# Altium PCB SLT_4U_PEE_V100.PcbDoc (part 7 of 7)
Units mm, origin at the board's own origin, x right, y up, seen from the top; angles counter-clockwise.
Board outline 180 x 80 mm, 6 copper layers (L1 TOP, L2 GND 1, L3 SIGNAL, L4 PWR, L5 GND 2, L6 BOT), stack 1.536 mm thick; 1123 components, 840 nets, 3813 pads, 351 vias.
Unrouted connection lines stored in the file: 2064.
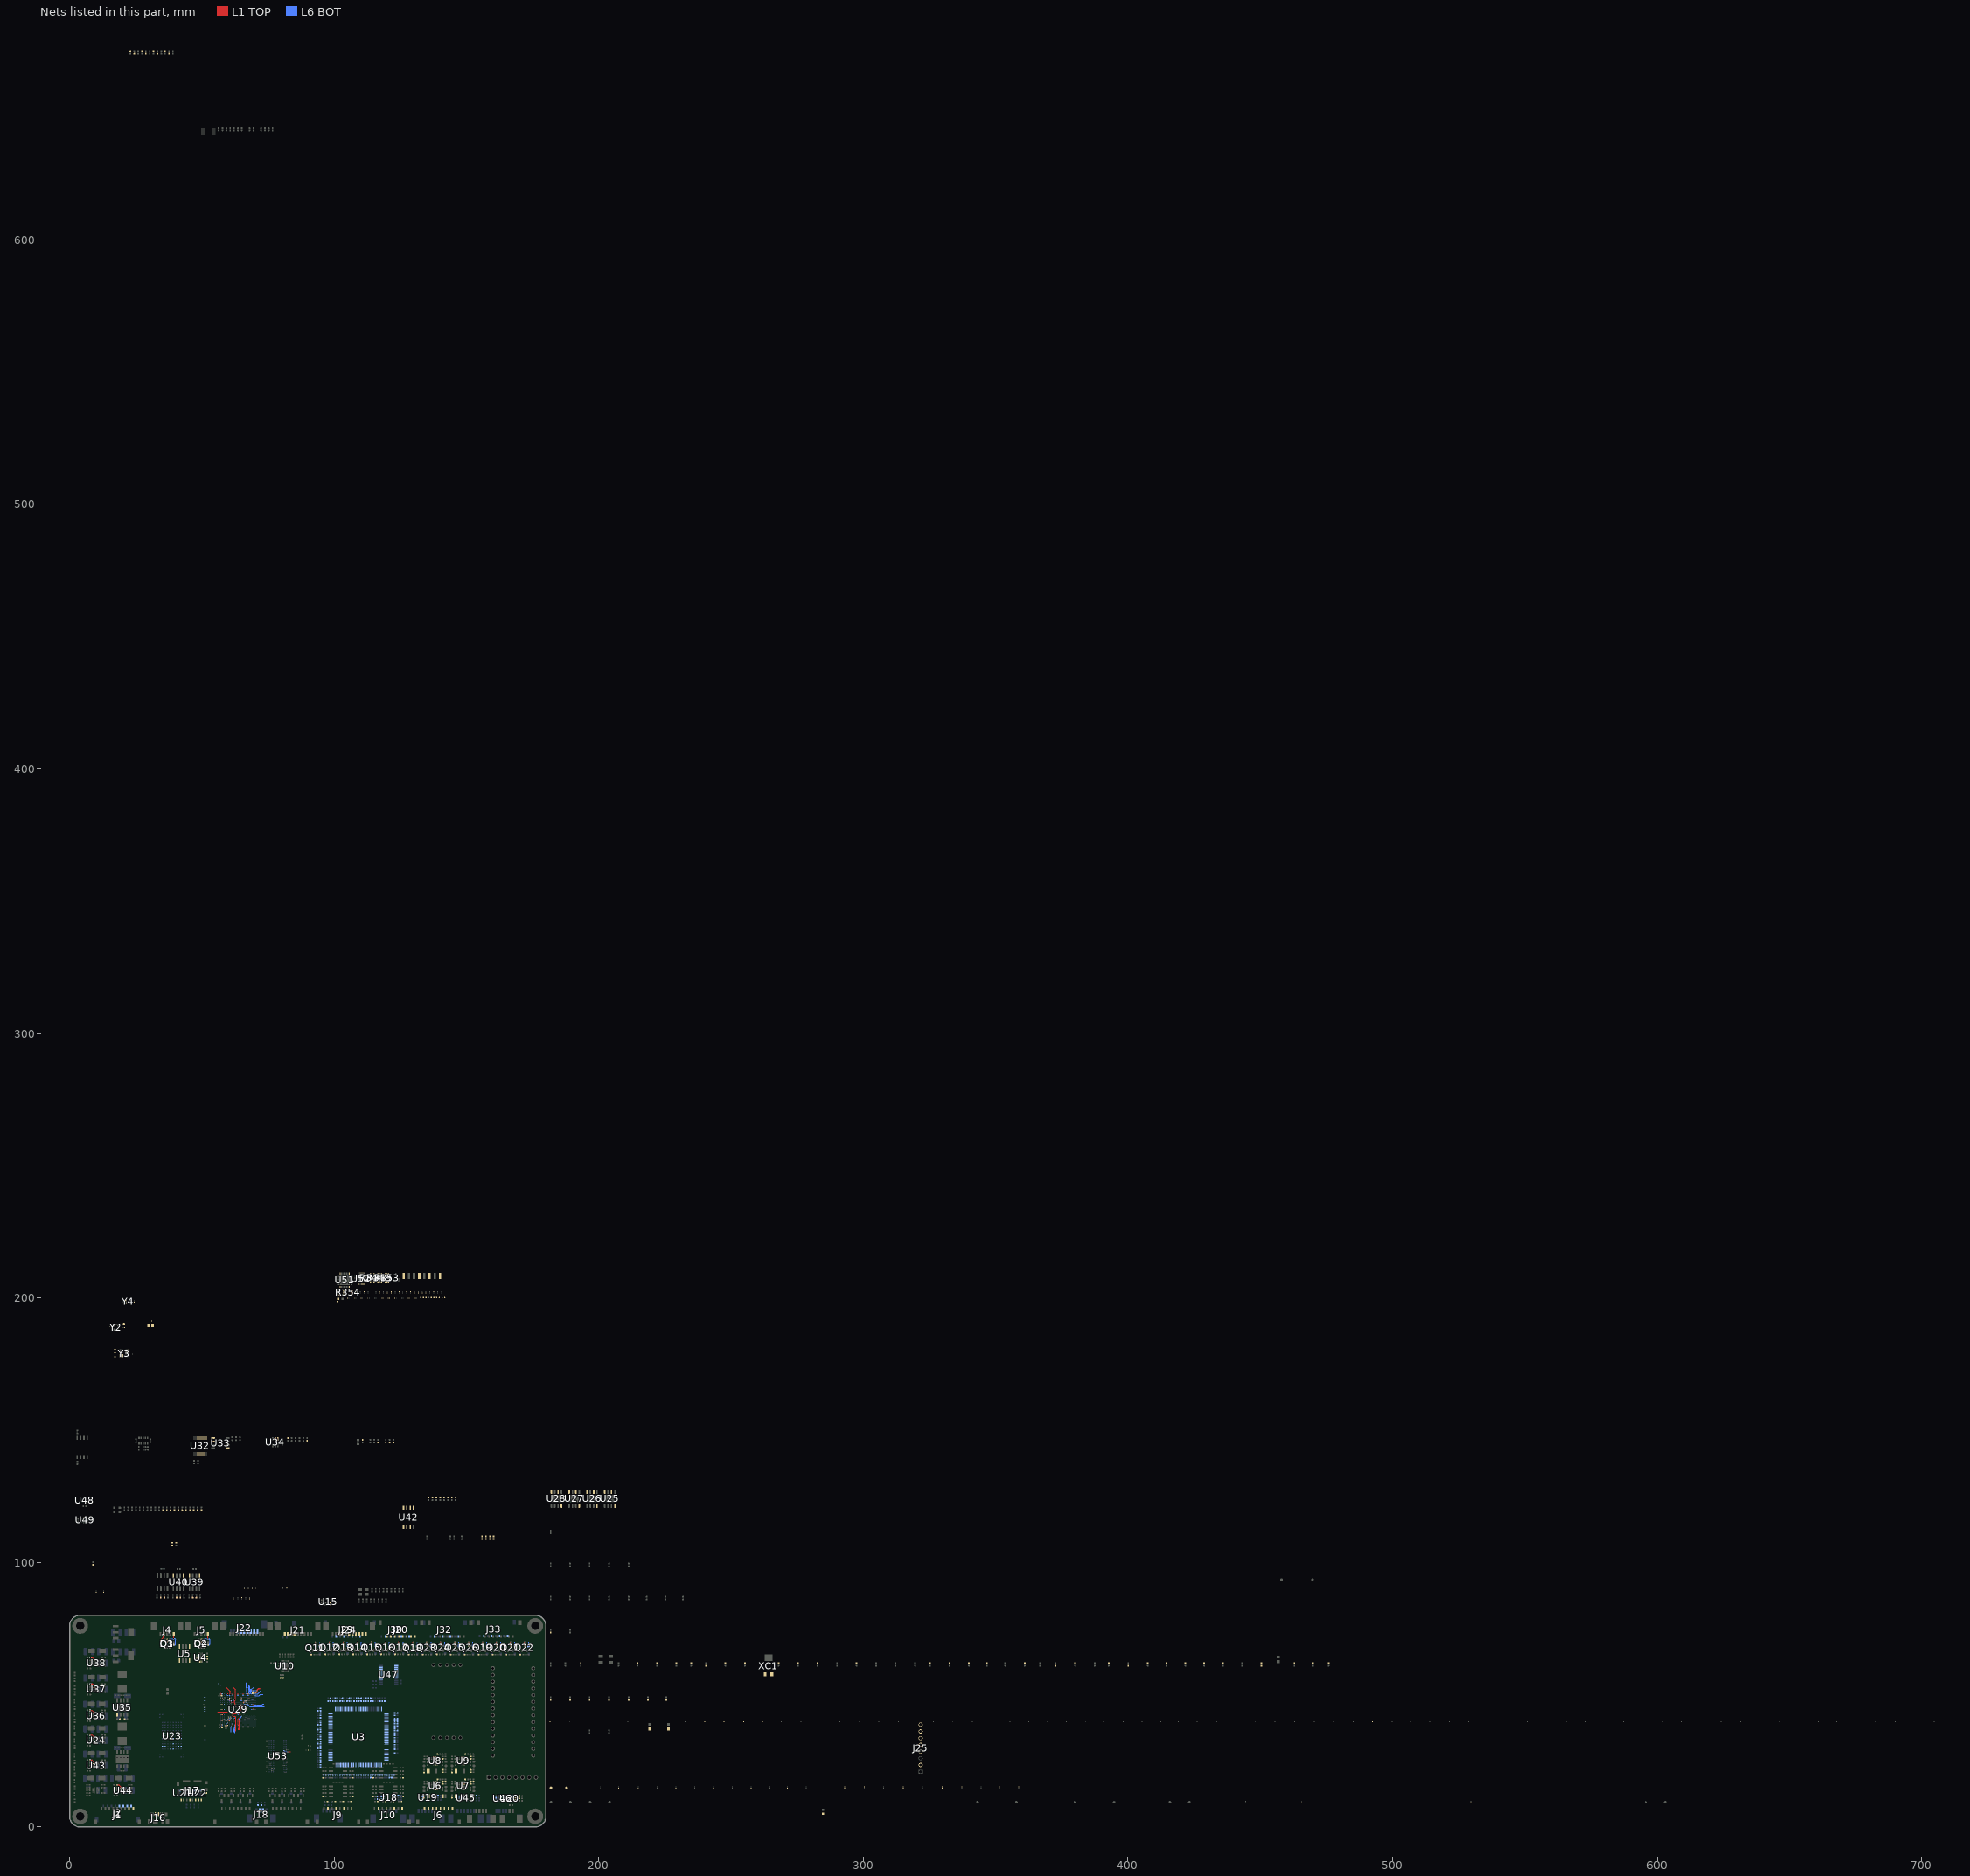
[diagram p7: the nets of this part, all layers, seen from the top]

## Via types
v1: diameter 0.35, hole 0.15, L1 TOP to L6 BOT, 281 vias
v2: diameter 0.4, hole 0.2, L1 TOP to L6 BOT, 61 vias
v3: diameter 0.4, hole 0.2, L1 TOP to L6 BOT, tented both sides, 9 vias

## Nets (pads, with @x,y where several pads share a name; then routed paths per layer and width w, separated by ;. In a path a pad name is that pad's centre, name@x,y a point inside that pad or via, vN(x,y) a via of type N, cw(c..) or ccw(c..) an arc to the next point about the centre after c; other vN are vias at no path point) (continued)
NetR531_2: R531.2 U29.H13 | length 7.6
  L1 TOP w0.125: 61.937,52.812 62.762,51.987 62.762,47.887 62.387,47.512 62.387,47.037 62.512,46.912 62.512,46.574 62.575,46.511 62.575,46.186 v1(62.612,46.148)
  L6 BOT w0.125: U29.H13@62.362,46.412 62.362,46.405 62.612,46.155 v1(62.612,46.148)
NetR532_2: R532.2 U29.C16 | length 3.9
  L1 TOP w0.125: 59.237,52.837 60.737,51.337 v1(60.737,49.987)
  L6 BOT w0.1: U29.C16@60.412,49.662 v1(60.737,49.987)
NetR539_1: R539.1 U53.L8 | length 2.6
  L1 TOP w0.125: v1(82.462,28.462) 83.475,28.462
  L6 BOT w0.125: U53.L8@81.062,28.862 81.462,28.462 v1(82.462,28.462)
NetU51_24: U51.24
NTC1-: J9.2 R170.1 R172.2
NTC2-: J9.4 R176.1 R178.2
NTC3-: J9.6 R182.1 R184.2
NTC4-: J9.8 R188.1 R190.2
NTC5-: J10.2 R171.1 R173.2
NTC6-: J10.4 R177.1 R179.2
NTC7-: J10.6 R183.1 R185.2
NTC8-: J10.8 R189.1 R191.2
NTRST_PC25: C299.2 J25.6 R534.1 U29.B1 | length 2.6
  L6 BOT w0.125: U29.B1@70.162,50.319 71.169,50.319 72.275,51.425
OBC_CANH: J1.8 R440.1 R445.1 R450.1
OBC_CANL: J1.9 R444.1 R449.1 R454.1
OBC_VS_SOM_SPI_SG_CS: J2.1 R356.1
OBC_VS_SOM_SPI_SG_MISO: J2.4 R358.1
OBC_VS_SOM_SPI_SG_MOSI: J2.3 R361.1
OBC_VS_SOM_SPI_SG_SCK: J2.2 R486.1
PA00: R11.1 U3.102
PA01: R13.1 U3.99
PA02: R15.1 U3.93
PA03: R17.1 U3.91
PA04: R18.1@94.886,26.162 U3.77
PA05: R20.1 U3.73
PA06: R22.1 U3.114
PA07_XIN32: C16.2 U3.35 XC1.1
PA08_XOUT32: C17.2 U3.36 XC1.2
PA09: R24.1 U3.75
PA10: R26.1@100.457,19.702 U3.66
PA11: R28.1 U3.64
PA12: R30.1 U3.68
PA13: R32.1 U3.42
PA14: R34.1 U3.51
PA15: R36.1 U3.49
PA16: R37.1 U3.45
PA17: R38.1 U3.25
PA18: J21.9 R272.2 U3.24
PA19: C213.2 R143.1 U3.23
PA20: C215.2 R150.1 U3.22
PA21: C216.2 R151.1 U3.32
PA22: R44.1 U3.37
PA23: R46.1 U3.46
PA24: R47.1 U3.56
PA25: R48.1 U3.59
PA26: R50.1 U3.62
PA27: R52.1 U3.70
PA28: R54.1 U3.112
PA29: R56.1 U3.129
PA30: R58.1 U3.116
PA31: R59.1 U3.118
PB00: C225.2 R73.2 U3.21
PB01: C226.2 R75.2 U3.20
PB02: C227.2 R77.2 U3.26
PB03: C228.2 R79.2 U3.31
PB04: R81.2 U3.105
PB05: R83.2 R86.2 U3.109
PB06: R85.2 U3.79
PB07: R88.2 U3.89
PB08: R90.2 U3.141
PB09: R92.2 U3.142
PB12: R94.2 U3.87
PB13: R96.2 U3.144
PC00: R278.1 U3.11
PC01: C217.2 R64.1 U3.38
PC02: R66.1 U3.39
PC03: R68.1 U3.40
PC04: R69.1 U3.41
PC05: R70.1 U3.58
PC06: R71.1 U3.54
PC07: R72.1 U3.48
PC08: R74.1 U3.82
PC09: R76.1 U3.86
PC10: R78.1 U3.90
PC11: R80.1 U3.94
PC12: R82.1 U3.17
PC13: C218.2 R84.1 U3.19
PC14: R87.1 U3.97
PC15: C219.2 R89.1 U3.18
PC16: R91.1 U3.100
PC17: R93.1 U3.103
PC18: R95.1 U3.111
PC19: R97.1 U3.117
PC20: R98.1 U3.120
PC21: R99.1 U3.122
PC22: R100.1 U3.124
PC23: R101.1 U3.127
PC24: R102.1 U3.130
PC25: R286.1 U3.133
PC26: R103.1 U3.13
PC27: R104.1 U3.12
PC28: R105.1 U3.76
PC29: C220.2 R106.1 U3.16
PC30: C221.2 R107.1 U3.15
PC31: C223.2 R108.1 U3.14
PD00: R12.2 U3.1
PD01: R14.2 U3.132
PD02: R16.2 U3.131
PD03: R18.2@475.831,61.985 U3.128
PD04: R19.2 U3.126
PD05: R21.2 U3.125
PD06: R23.2 U3.121
PD07: R25.2@470.006,61.985 U3.119
PD08: R26.2@450.43,61.985 U3.113
PD09: R25.2@99.568,47.608 U3.110
PD10: R27.2 U3.101
PD11: R29.2 U3.98
PD12: R31.2 U3.92
PD13: R33.2 U3.88
PD14: R35.2 U3.84
PD15: R131.2 U3.106
PD16: R133.2 U3.78
PD17: R39.2 U3.74
PD18: R40.2 U3.69
PD19: R41.1 U3.67
PD20: R42.2 U3.65
PD21: R43.2 U3.63
PD22: R45.2 U3.60
PD23: R126.2 U3.57
PD24: R127.2 U3.55
PD25: R49.2 U3.52
PD26: R51.2 U3.53
PD27: R53.2 U3.47
PD28: R55.2 U3.71
PD29: R57.1 U3.108
PD30: R277.1 U3.34
PD31: R60.2 U3.2
PE00: R279.2 U3.4
PE01: R65.2 U3.6
PE02: R67.2 U3.7
PE03: C229.2 R281.2 U3.10
PE04: C230.2 R282.2 U3.27
PE05: C231.2 R283.2 U3.28
PHOTO_ADC_CONV: J21.8 R36.2 R271.2
PHOTO_ADC_CS: J21.7 R12.1 R270.2
PHOTO_SPI0_nCS2: J21.6 R31.1 R269.2
POW_ONOFF_BUCK_PERI: R133.1 R411.2 R414.1 U35.5
POW_ONOFF_HD4: R21.1 R424.2 R429.1 U37.1 | length 2.5
  L1 TOP w0.254: v2(7.859,54.078) 8.479,54.078 cw(c8.479,53.824) 8.659,54.004 9.315,53.348 cw(c9.135,53.168) 9.389,53.168 9.389,52.937 U37.1@9.19,52.738
POW_ONOFF_HEATER: R131.1 R210.2 R223.1 U44.1 | length 2.5
  L1 TOP w0.254: v2(17.938,15.883) 18.559,15.883 cw(c18.559,15.629) 18.738,15.809 19.394,15.153 cw(c19.214,14.974) 19.468,14.974 19.468,14.742 U44.1@19.269,14.543
POW_ONOFF_LP: R26.1@450.43,60.985 R128.2 R139.1 U43.1 | length 2.5
  L1 TOP w0.254: v2(7.772,25.281) 8.393,25.281 cw(c8.393,25.027) 8.572,25.207 9.228,24.551 cw(c9.048,24.372) 9.302,24.372 9.302,24.14 U43.1@9.103,23.941
POW_ONOFF_Solenoid: R23.1 R432.2 R437.1 U38.1 | length 2.5
  L1 TOP w0.254: v2(7.874,64.008) 8.495,64.008 cw(c8.495,63.754) 8.674,63.934 9.33,63.278 cw(c9.15,63.099) 9.404,63.099 9.404,62.867 U38.1@9.205,62.668
POW_ONOFF_SOM: R16.1 R248.2 R252.1 U24.1 | length 2.5
  L1 TOP w0.254: v2(7.775,34.806) 8.396,34.806 cw(c8.396,34.552) 8.575,34.732 9.231,34.076 cw(c9.051,33.897) 9.305,33.897 9.305,33.665 U24.1@9.106,33.466
POW_ONOFF_TEC: R19.1 R416.2 R421.1 U36.1 | length 2.5
  L1 TOP w0.254: v2(7.775,44.077) 8.396,44.077 cw(c8.396,43.823) 8.575,44.003 9.231,43.347 cw(c9.051,43.168) 9.305,43.168 9.305,42.936 U36.1@9.106,42.737
PRAM_MISO: U32.12 U33.2
PRAM_MOSI: U32.9 U33.5
PRAM_nCS: U32.4 U33.1
PRAM_SCK: U32.7 U33.6
SAM7_FLEX1_I2C_SCL: R329.2 R345.2 R515.1 U52.4
SAM7_FLEX1_I2C_SDA: R330.2 R343.2 R514.1 U52.5
SD2_CLK: J17.P5 R231.1 R485.1 U21.3
SD2_CMD: J17.P3 R232.1 R459.1 U22.6
SD2_DATA0: J17.P7 R227.1 R487.1 U21.6
SD2_DATA1: J17.P8 R228.1 R510.1 U21.1
SD2_DATA2: J17.P1 R229.1 R511.1 U22.3
SD2_DATA3: J17.P2 R230.1 R512.1 U22.4
SD2_nCD: J17.P9 R226.1 R513.1
SENSE1_N: R353.4 U52.12
SENSE1_P: R353.3 U52.11
SENSE2_N: R354.4 U52.14
SENSE2_P: R354.3 U52.13
SENSE3_N: R344.4 U52.7
SENSE3_P: R344.3 U52.8
SENSE4_N: R349.4 U52.9
SENSE4_P: R349.3 U52.10
SENSOR1_EN: R76.2 R213.1 U18.5
SENSOR2_EN: R78.2 R217.1 U19.5
SENSOR3_EN: R54.2 R462.1 U45.5
SENSOR4_EN: R56.2 R465.1 U46.5
SENSOR5_EN: R80.2 R225.1 U20.5
SENSOR_I2C1_SCL: R86.1 R206.2 R221.2 U18.2 U19.2 U20.2 U45.2 U46.2 U48.2 U49.13
SENSOR_I2C1_SDA: R81.1 R205.2 R220.2 U18.3 U19.3 U20.3 U45.3 U46.3 U48.4 U49.14
SHDN: R335.1 U29.R9 | length 5.6
  L1 TOP w0.125: 64.237,36.669 64.237,37.037 64.337,37.137 64.337,38.437 64.262,38.512 v1(64.262,40.237)
  L6 BOT w0.1: v1(64.262,40.237) 64.262,41.012 64.837,41.587 64.837,41.683 64.962,41.808 U29.R9@64.962,41.862
SOL_1_OUT1: J20.2 U25.6
SOL_1_OUT2: J20.1 U25.8
SOL_1_VREF: R257.2 R258.1 R260.2 R261.1 R263.2 R264.1 R266.2 R267.1 U25.4 U26.4 U27.4 U28.4
SOL_2_OUT1: J20.4 U26.6
SOL_2_OUT2: J20.3 U26.8
SOL_3_OUT1: J20.6 U27.6
SOL_3_OUT2: J20.5 U27.8
SOL_4_OUT1: J20.8 U28.6
SOL_4_OUT2: J20.7 U28.8
SOLENOID_A_1: DZ1.1 J29.2 Q11.3 | length 2.8
  L1 TOP w0.254: Q11.3@92.964,68.691 v2(92.964,69.977)
  L6 BOT w0.254: DZ1.1@94.517,68.326 94.517,69.857
SOLENOID_A_2: DZ2.1 J29.4 Q12.3 | length 2.8
  L1 TOP w0.254: Q12.3@98.23,68.818 v2(98.23,70.104)
  L6 BOT w0.254: DZ2.1@99.783,68.453 99.783,69.984
SOLENOID_A_3: DZ3.1 J29.6 Q13.3 | length 2.8
  L1 TOP w0.254: Q13.3@103.497,68.818 v2(103.497,70.104)
  L6 BOT w0.254: DZ3.1@105.05,68.453 105.05,69.984
SOLENOID_A_4: DZ4.1 J29.8 Q14.3 | length 2.8
  L1 TOP w0.254: Q14.3@108.763,68.818 v2(108.763,70.104)
  L6 BOT w0.254: DZ4.1@110.316,68.453 110.316,69.984
SOLENOID_A_5: DZ5.1 J30.2 Q15.3 | length 2.8
  L1 TOP w0.254: Q15.3@114.029,68.802 v2(114.029,70.088)
  L6 BOT w0.254: DZ5.1@115.582,68.437 115.582,69.968
SOLENOID_A_6: DZ6.1 J30.4 Q16.3 | length 2.8
  L1 TOP w0.254: Q16.3@119.295,68.818 v2(119.295,70.104)
  L6 BOT w0.254: DZ6.1@120.848,68.453 120.848,69.984
SOLENOID_A_7: DZ7.1 J30.6 Q17.3 | length 2.8
  L1 TOP w0.254: Q17.3@124.562,68.818 v2(124.562,70.104)
  L6 BOT w0.254: DZ7.1@126.115,68.453 126.115,69.984
SOLENOID_A_8: DZ8.1 J30.8 Q18.3 | length 2.8
  L1 TOP w0.254: Q18.3@129.828,68.691 v2(129.828,69.977)
  L6 BOT w0.254: DZ8.1@131.381,68.326 131.381,69.857
SOLENOID_A_9: DZ9.1 J32.2 Q19.3 | length 2.8
  L1 TOP w0.254: Q19.3@156.159,68.716 v2(156.159,70.002)
  L6 BOT w0.254: DZ9.1@157.712,68.351 157.712,69.883
SOLENOID_A_10: DZ10.1 J32.4 Q20.3 | length 2.8
  L1 TOP w0.254: Q20.3@161.425,68.716 v2(161.425,70.002)
  L6 BOT w0.254: DZ10.1@162.978,68.351 162.978,69.883
SOLENOID_A_11: DZ11.1 J32.6 Q21.3 | length 2.8
  L1 TOP w0.254: Q21.3@166.692,68.716 v2(166.692,70.002)
  L6 BOT w0.254: DZ11.1@168.245,68.351 168.245,69.883
SOLENOID_A_12: DZ12.1 J32.8 Q22.3 | length 2.8
  L1 TOP w0.254: Q22.3@171.958,68.716 v2(171.958,70.002)
  L6 BOT w0.254: DZ12.1@173.511,68.351 173.511,69.883
SOLENOID_A_13: DZ13.1 J33.2 Q23.3 | length 2.8
  L1 TOP w0.254: Q23.3@135.094,68.716 v2(135.094,70.002)
  L6 BOT w0.254: DZ13.1@136.647,68.351 136.647,69.883
SOLENOID_A_14: DZ14.1 J33.4 Q24.3 | length 2.8
  L1 TOP w0.254: Q24.3@140.36,68.818 v2(140.36,70.104)
  L6 BOT w0.254: DZ14.1@141.913,68.453 141.913,69.984
SOLENOID_A_15: DZ15.1 J33.6 Q25.3 | length 2.8
  L1 TOP w0.254: Q25.3@145.627,68.716 v2(145.627,70.002)
  L6 BOT w0.254: DZ15.1@147.18,68.351 147.18,69.883
SOLENOID_A_16: DZ16.1 J33.8 Q26.3 | length 2.8
  L1 TOP w0.254: Q26.3@150.893,68.716 v2(150.893,70.002)
  L6 BOT w0.254: DZ16.1@152.446,68.351 152.446,69.883
SOLENOID_CTR_1: R466.2 U47.4
SOLENOID_CTR_2: R467.2 U47.5
SOLENOID_CTR_3: R468.2 U47.6
SOLENOID_CTR_4: R469.2 U47.7
SOLENOID_CTR_5: R474.2 U47.8
SOLENOID_CTR_6: R475.2 U47.9
SOLENOID_CTR_7: R476.2 U47.10
SOLENOID_CTR_8: R477.2 U47.11
SOLENOID_CTR_9: R201.2 U47.13
SOLENOID_CTR_10: R202.2 U47.14
SOLENOID_CTR_11: R491.2 U47.15
SOLENOID_CTR_12: R492.2 U47.16
SOLENOID_CTR_13: R497.2 U47.17
SOLENOID_CTR_14: R498.2 U47.18
SOLENOID_CTR_15: R499.2 U47.19
SOLENOID_CTR_16: R500.2 U47.20
SOM_CAM_CK_N: J24.5 R312.1
SOM_CAM_CK_P: J24.6 R314.1
SOM_CAM_D0_N: J24.1 R316.1
SOM_CAM_D0_P: J24.2 R318.1
SOM_CAM_D1_N: J24.3 R319.1
SOM_CAM_D1_P: J24.4 R320.1
SOM_CAM_I2C_SCL: J24.9 R520.1
SOM_CAM_I2C_SDA: J24.8 R522.1
SOM_CANRX0: R519.1 U39.4
SOM_CANRX1: R523.1 U40.4
SOM_CANTX0: R517.1 U39.1
SOM_CANTX1: R521.1 U40.1
SOM_CONSOLE_RX: J18.3 R245.1 R518.1
SOM_CONSOLE_TX: J18.2 R244.1 R516.1
SOM_EMMC_nRST: R243.1 R360.1 U23.M5@39.164,31.48
SOM_MRAM_QSPI_CLK: R385.1 U42.6
SOM_MRAM_QSPI_IO0: R383.1 U42.5
SOM_MRAM_QSPI_IO1: R382.1 U42.2
SOM_MRAM_QSPI_IO2: R380.1 U42.3
SOM_MRAM_QSPI_IO3: R378.1 U42.7
SOM_PHOTO_ADC_CONV: J22.8 R275.2
SOM_PHOTO_ADC_EOC: J22.9 R276.2 R524.1
SOM_PHOTO_ADC_nCS: J22.7 R274.2 R370.1
SOM_PHOTO_SPI_MISO: J22.5 R364.1
SOM_PHOTO_SPI_MOSI: J22.4 R362.1
SOM_PHOTO_SPI_SCK: J22.3 R367.1
SOM_PHOTO_SW_nCS: J22.6 R273.2 R359.1
SOM_PRAM_nCS: R287.1 R456.1 U32.3
SOM_PRAM_SPI_MISO: R458.1 U32.13
SOM_PRAM_SPI_MOSI: R457.1 U32.10
SOM_PRAM_SPI_SCK: R395.1 U32.6
SOM_RAM_QSPI_nCS: R384.1 R455.1 U42.1
SOM_SDMMC0_OUT_CK: R242.1 R355.1 U23.P6@38.164,29.48
SOM_SDMMC0_OUT_CMD: R241.1 R357.1 U23.P5@39.164,29.48
SOM_SDMMC0_OUT_D0: R240.1 R363.1 U23.K2@42.164,33.48
SOM_SDMMC0_OUT_D1: R239.1 R365.1 U23.N2@42.164,30.48
SOM_SDMMC0_OUT_D2: R238.1 R368.1 U23.K3@41.164,33.48
SOM_SDMMC0_OUT_D3: R237.1 R371.1 U23.N3@41.164,30.48
SOM_SDMMC0_OUT_D4: R236.1 R373.1 U23.N8@36.164,30.48
SOM_SDMMC0_OUT_D5: R235.1 R375.1 U23.K8@36.164,33.48
SOM_SDMMC0_OUT_D6: R234.1 R377.1 U23.N9@35.164,30.48
SOM_SDMMC0_OUT_D7: R233.1 R379.1 U23.K9@35.164,33.48
SOM_SDMMC0_OUT_DS: R381.1 U23.K5@39.164,33.48
SOM_STATUS_LED_1: DS12.1 R531.1
SOM_STATUS_LED_2: DS13.1 R532.1
SOM_USB_LED_1: R113.1 R530.1
SOM_USB_LED_2: R118.1 R389.1
SOM_USB_N: R308.1 U4.3
SOM_USB_P: R309.1 U4.2
SOM_USB_PWR_EN1: R123.1 R374.1 U5.1
SOM_USB_PWR_EN2: R122.1 R376.1 U5.4
SOM_USB_SW_nOE: R111.2 R366.1 U4.15
SOM_USB_SW_SEL0: R116.1 R369.1 U4.6
SOM_USB_SW_SEL1: R115.1 R372.1 U4.5
TCK_SWCLK_PC26: J25.5 U29.H7 | length 11.4
  L1 TOP w0.1: 64.312,42.512 64.312,43.712 64.487,43.887 64.587,43.887 64.712,44.012 64.712,45.037 64.962,45.287 64.962,45.587 65.137,45.762 65.62,45.762 v1(65.962,46.104)
  L1 TOP w0.125: 63.887,36.703 63.887,37.162 64.037,37.312 64.037,38.237 63.762,38.512 63.762,40.787 64.462,41.487 64.462,42.362 64.312,42.512
  L6 BOT w0.1: v1(65.962,46.104) 65.962,46.112 U29.H7@66.262,46.412
TDI_PC28: J25.4 U29.H6 | length 7.1
  L6 BOT w0.1: U29.H6@66.912,46.412 67.112,46.412 68.087,45.437 73.609,45.437
TDO_PC29: J25.7 U29.A2 | length 2.6
  L6 BOT w0.1: U29.A2@69.512,50.969 69.487,50.994 69.487,51.462 69.64,51.615
  L6 BOT w0.125: 69.64,51.615 69.687,51.662 70.912,51.662 71.348,52.098
TEC_ADC_1: U6.20 U10.2
TEC_ADC_2: U8.20 U10.3
TEC_ADC_3: U7.20 U10.4
TEC_ADC_4: U9.20 U10.5
TEC_nCS_1: R95.2 R124.2 U6.15
TEC_nCS_2: R98.2 R134.2 U8.15
TEC_nCS_3: R100.2 R125.2 U7.15
TEC_nCS_4: R29.1 R135.2 U9.15
TEC_OUT_A_1: C43.2 C44.2 C55.2 J6.5 U6.8 U6.9
TEC_OUT_A_2: C65.2 C66.2 C77.2 J6.1 U8.8 U8.9
TEC_OUT_A_3: C45.2 C46.2 C56.2 J6.7 U7.8 U7.9
TEC_OUT_A_4: C67.2 C68.2 C78.2 J6.3 U9.8 U9.9
TEC_OUT_B_1: C55.1 C61.2 J6.6 L2.2 U6.12
TEC_OUT_B_2: C77.1 C83.2 J6.2 L4.2 U8.12
TEC_OUT_B_3: C56.1 C62.2 J6.8 L3.2 U7.12
TEC_OUT_B_4: C78.1 C84.2 J6.4 L5.2 U9.12
TEC_SPI_MISO: R103.2 R285.2 U6.18 U7.18 U8.18 U9.18 U32.14
TEC_SPI_MOSI: R104.2 U6.17 U7.17 U8.17 U9.17 U32.11
TEC_SPI_SCK: R102.2 U6.16 U7.16 U8.16 U9.16 U32.5
TEC_SWEN_1: R58.2 R130.1 U6.13
TEC_SWEN_2: R33.1 R140.1 U8.13
TEC_SWEN_3: R64.2 R132.1 U7.13
TEC_SWEN_4: R66.2 R142.1 U9.13
"TEMP _SENSOR": R107.2 U15.2
TMS_SWDIO_PC27: J25.8 U29.C1 | length 3.1
  L6 BOT w0.125: U29.C1@70.162,49.665 71.59,49.665 72.035,50.11 73.076,50.11
USB1_N: J16.2 R304.1
USB1_P: J16.3 R305.1
USB_CONN_LED_1: J4.4 R114.2 | length 3.5
  L1 TOP w0.254: R114.2@34.544,69.867 34.544,70.634 cw(c34.798,70.634) 34.618,70.813 35.441,71.636 ccw(c35.261,71.816) 35.515,71.816 35.515,72.793 J4.4@35.62,72.898
USB_PWR1: D3.5 J4.1 Q1.2 R112.1 R121.1 U5.8 | length 8.3
  L1 TOP w0.254: v2(36.901,70.541) D3.5@36.921,70.541 ; v2(39.37,71.12) J4.1@39.37,72.898
  L6 BOT w0.254: v2(36.901,70.541) 37.698,70.541 37.847,70.392 Q1.2@37.847,70.286 ; Q1.2@37.871,70.286 38.044,70.81 38.28,71.046 cw(c38.459,70.866) 38.459,71.12 39.646,71.12 cw(c39.646,70.866) 39.825,71.046 40.037,70.834 cw(c39.857,70.655) 40.111,70.655 40.111,69.172 cw(c39.857,69.172) 40.037,68.993 39.973,68.929 cw(c39.794,69.109) 39.794,68.855 39.52,68.855 R112.1@39.37,68.817
USB_PWR2: D4.5 J5.1 Q2.2 R117.1 R120.1 U5.5 | length 8.3
  L1 TOP w0.254: v2(49.855,70.541) D4.5@49.875,70.541 ; v2(52.324,71.12) J5.1@52.324,72.898
  L6 BOT w0.254: v2(49.855,70.541) 50.652,70.541 50.801,70.392 Q2.2@50.801,70.286 ; Q2.2@50.825,70.286 50.998,70.81 51.234,71.046 cw(c51.413,70.866) 51.413,71.12 v2(52.324,71.12) 52.6,71.12 cw(c52.6,70.866) 52.779,71.046 52.967,70.858 cw(c52.787,70.679) 53.041,70.679 53.041,69.148 cw(c52.787,69.148) 52.967,68.969 52.926,68.928 cw(c52.746,69.108) 52.746,68.854 52.474,68.854 R117.1@52.324,68.817
USBA_N: R299.2 U29.B3 | length 2
  L6 BOT w0.125: 68.537,52.175 68.537,50.644 U29.B3@68.862,50.319
USBA_P: R300.2 U29.A3 | length 2.1
  L6 BOT w0.125: U29.A3@68.862,50.969 68.862,52.04 69.572,52.75
USBB_N: R304.2 U29.B4 | length 3.3
  L6 BOT w0.125: 67.817,53.417 67.817,51.835 67.96,51.692 67.96,51.298 67.9,51.237 67.9,50.625 U29.B4@68.212,50.312
USBB_P: R305.2 U29.A4 | length 2.4
  L6 BOT w0.125: 68.142,53.282 68.142,51.97 68.285,51.827 68.285,51.163 68.246,51.123 68.246,50.996 U29.A4@68.212,50.962
USBC_N: R308.2 U29.B6 | length 4.3
  L6 BOT w0.125: U29.B6@66.912,50.312 66.946,50.346 66.946,50.554 67.225,50.833 67.225,51.092 67.225,52.656 67.125,52.756 67.125,54.279 67.198,54.352 67.212,54.352
USBC_P: R309.2 U29.A6 | length 3.6
  L6 BOT w0.125: U29.A6@66.912,50.962 66.925,50.975 66.925,52.532 66.825,52.632 66.825,54.404 66.912,54.491 66.912,54.512
VDD_1V15_OUT3: C290.2 L9.2 R344.1 TP9.0 U51.25
VDD_1V15_OUT4: C292.2 L10.2 R349.1 TP11.0 U51.32
VDD_1V35: C288.2 L8.2 R354.1 TP7.0 U51.16
VDD_3V3: C191.2 C267.2 C279.2 C282.2 C283.1 C284.1 C285.1 C286.1 J25.2 L7.2 R302.2 R329.1 R330.1 R336.1 R337.1 R340.2 R342.2 R350.1 R353.1 R390.2 R393.2 R455.2 R460.2 R534.2 R535.2 TP6.0 U42.8 U51.9 U52.2 U52.15 Y2.4 Y4.1 Y4.4
VDD_3V3_MPU: C235.1 C236.1 C237.1 C238.1 C239.1 C240.1 C241.1 C242.1 C243.1 C297.1 C298.1 R351.1 R352.1 R353.2 TP14.0 U29.C11 U29.C14 U29.C17 U29.F13 U29.H19 U29.J16 U29.N16 U29.T13 U29.W14 | length 11
  L1 TOP w0.1: C239.1@59.65,43.187 C239.1@59.65,43.225
  L1 TOP w0.2: v1(55.837,43.137) 56.237,43.537 59.337,43.537 C239.1@59.65,43.225
  L1 TOP w0.3: C242.1@57.7,46.412 v1(58.087,46.412) ; C240.1@59.629,45.752 59.639,45.752 59.65,45.762 v1(60.037,45.762) ; C239.1@59.65,43.187 59.675,43.162 v1(60.037,43.162) ; v1(59.762,50.037) C235.1@59.762,50.425 ; C243.1@61.712,38.5 v1(61.712,38.887) ; v1(61.712,50.037) C236.1@61.712,50.425 ; C238.1@62.362,40.45 v1(62.362,40.837) ; v1(62.362,48.087) C237.1@62.362,48.475 ; v1(63.662,50.037) C241.1@63.662,50.425
  L6 BOT w0.3: v1(58.087,46.412) U29.H19@58.462,46.412 ; U29.C17@59.762,49.662 v1(59.762,50.037) ; v1(60.037,43.162) U29.N16@60.412,43.162 ; v1(60.037,45.762) U29.J16@60.412,45.762 ; v1(61.712,38.887) U29.W14@61.712,39.262 ; U29.C14@61.712,49.662 v1(61.712,50.037) ; v1(62.362,40.837) U29.T13@62.362,41.212 ; U29.F13@62.362,47.712 v1(62.362,48.087) ; U29.C11@63.662,49.662 v1(63.662,50.037)
VDDANA: C247.2 C269.1 C270.1 C271.1 C277.1 C278.1 U29.E5 U29.E6 U29.G6 U29.J6 U29.T15 U29.T16 | length 5
  L1 TOP w0.3: v1(60.087,40.887) C270.1@60.087,41.275 ; v1(60.737,40.887) C247.2@60.737,41.275 ; C269.1@67.175,46.337 v1(67.237,46.737) ; C277.1@67.237,48.3 v1(67.237,48.687) ; v1@67.295,45.761 C271.1@67.627,45.761 ; C278.1@67.887,48.3 v1(67.887,48.687)
  L6 BOT w0.3: v1(60.087,40.887) U29.T16@60.412,41.212 ; v1(60.737,40.887) U29.T15@61.062,41.212 ; U29.J6@66.912,45.762 v1(67.287,45.762) ; U29.G6@66.912,47.062 v1(67.237,46.737) ; U29.E6@66.912,48.362 v1(67.237,48.687) ; U29.E5@67.562,48.362 v1(67.887,48.687)
VDDBU: C275.1 R306.2 R339.2 R?.2 U29.P11 | length 9.4
  L1 TOP w0.1: 62.727,41.723 62.587,41.862 61.837,41.862 61.712,41.987 61.712,42.387 62.156,42.831 v1(63.339,42.831)
  L1 TOP w0.125: 62.727,41.723 62.837,41.612 62.837,36.162
  L6 BOT w0.3: v1(63.339,42.831) 63.343,42.831 U29.P11@63.662,42.512
VDDCORE: C244.1 C245.1 C246.1 C248.1 C249.1 C250.1 C251.1 C252.1 C253.1 C254.1 C255.1 C256.1 C257.1 C258.1 C259.1 C260.1 R344.2 TP8.0 U29.F6 U29.F9 U29.F15 U29.J9 U29.J13 U29.L3 U29.L19 U29.N13 U29.P19 U29.U16 U29.U17 U29.U19 U29.W17 U29.Y20 | length 13.2
  L1 TOP w0.3: C254.1@57.412,38.65 57.425,38.65 57.427,38.652 v1(57.484,38.287) C260.1@57.609,37.737 ; C255.1@57.69,40.288 57.695,40.283 57.7,40.287 v1(58.087,40.562) ; C251.1@57.7,42.512 v1(58.088,42.512) ; C257.1@57.7,44.462 v1(58.087,44.462) ; C256.1@59.01,40.3 59.036,40.3 59.061,40.3 59.087,40.3 C256.1@59.09,40.3 ; C256.1@59.09,40.313 v1(59.437,40.237) ; C244.1@59.129,38.272 59.762,38.5 v1(59.762,38.887) ; v1(60.087,40.237) C248.1@60.475,40.237 ; C252.1@60.987,47.325 v1(61.387,47.387) ; C258.1@61.67,42.83 v1(62.037,43.487) ; C259.1@61.975,45.687 v1(62.037,46.087) ; C250.1@64.887,46.1 v1(65.287,46.087) ; v1(64.962,48.187) C249.1@64.962,48.55 ; v1(66.587,47.387) C246.1@66.587,47.775 ; v1(69.237,44.462) 69.26,44.462 C245.1@69.632,44.462
  L6 BOT w0.3: v1(57.484,38.287) 57.487,38.287 U29.Y20@57.812,38.612 ; v1(58.087,40.562) U29.U19@58.462,40.562 ; v1(58.087,44.462) U29.L19@58.462,44.462 ; v1(58.088,42.512) U29.P19@58.462,42.512 ; v1(59.437,40.237) U29.U17@59.762,40.562 ; v1(59.762,38.887) U29.W17@59.762,39.262 ; v1(60.087,40.237) U29.U16@60.412,40.562 ; U29.F15@61.062,47.712 v1(61.387,47.387) ; v1(62.037,43.487) U29.N13@62.362,43.162 ; v1(62.037,46.087) U29.J13@62.362,45.762 ; U29.J9@64.962,45.762 v1(65.287,46.087) ; U29.F9@64.962,47.712 v1(64.962,48.187) ; v1(66.587,47.387) U29.F6@66.912,47.712 ; U29.L3@68.862,44.462 v1(69.237,44.462)
VDDCPU: C150.1 C151.1 C152.1 C232.1 C233.1 C234.1 R349.2 TP10.0 U29.B20 U29.E16 U29.E17 U29.E19 U29.F16 | length 5.1
  L1 TOP w0.3: C233.1@57.426,50.208 57.424,50.208 57.415,49.615 C150.1@57.464,49.615 ; C233.1@57.425,50.237 v1(57.487,50.637) ; C234.1@57.706,48.636 57.716,48.646 57.716,48.649 v1(58.087,48.362) ; C232.1@58.984,48.868 59.243,48.868 59.414,48.697 59.433,48.697 v1@59.447,48.71 ; v1(60.087,48.687) C151.1@60.475,48.687 ; C152.1@60.334,48.047 60.345,48.037 60.35,48.037 v1(60.737,48.037)
  L6 BOT w0.3: v1(57.487,50.637) U29.B20@57.812,50.312 ; v1(58.087,48.362) U29.E19@58.462,48.362 ; v1(59.437,48.687) U29.E17@59.762,48.362 ; v1(60.087,48.687) U29.E16@60.412,48.362 ; U29.F16@60.412,47.712 v1(60.737,48.037)
VDDIN33: C273.1 C274.1 R351.2 U29.H3 | length 1.5
  L1 TOP w0.3: 69.625,46.512 v1(69.237,46.412) 69.637,45.762
  L6 BOT w0.3: U29.H3@68.862,46.412 v1(69.237,46.412)
VDDIODDR: C329.1 C333.1 R354.2 R540.1 R542.1 TP16.0
VDDSDMMC0: TP3.0
VDDSDMMC1: TP4.0
VDDUTMII: C261.1 C262.1 C263.1 C264.1 C266.1 C268.1 R352.2 U29.B2 U29.C5 U29.C8 U29.E3 U29.F7 | length 7.7
  L1 TOP w0.3: v1(65.612,50.037) C266.1@65.612,50.425 ; C262.1@65.675,46.987 v1(65.937,47.387) ; v1(67.539,50.056) 67.549,50.066 67.549,50.411 C263.1@67.562,50.425 ; C261.1@69.184,50.546 69.275,50.637 v1(69.837,50.637) 70.237,50.7 v2@70.718,50.775 ; v1(69.237,48.362) C264.1@69.625,48.362
  L1 TOP w0.5: v2(70.712,50.812) 71.012,51.112 v2(71.012,51.212) 71.012,51.937 71.407,52.332 72.017,52.332
  L6 BOT w0.3: U29.C8@65.612,49.662 v1(65.612,50.037) ; v1(65.937,47.387) U29.F7@66.262,47.712 ; v1(67.539,50.056) 67.549,50.047 67.549,49.675 U29.C5@67.562,49.662 ; U29.E3@68.862,48.362 v1(69.237,48.362) ; U29.B2@69.512,50.312 v1(69.837,50.637)
VLDO1: C295.1 TP12.0 U51.19
VLDO2: C296.1 TP13.0 U51.21
VUSB: J16.1 JP2.2
WD_DONE: R65.1 U34.4
WD_nRESET: R62.2 R402.2 R408.1
WD_WAKE: R67.1 U34.5
WKUP: R339.1 U29.AA15 U51.7 | length 2
  L6 BOT w0.125: 61.062,35.962 U29.AA15@61.062,37.962
XIN: R322.2 R325.2 TP5.0 U29.J2 | length 4.2
  L6 BOT w0.125: U29.J2@69.512,45.762 69.837,46.087 70.01,46.087 70.022,46.075 70.337,46.075 70.362,46.05 70.849,46.05 70.887,46.087 72.762,46.087 73.132,46.457 73.381,46.457
XIN32: C265.1 R324.1 R326.2 U29.Y13 Y1.2 | length 3.2
  L6 BOT w0.125: U29.Y13@62.362,38.612 62.687,38.287 62.687,37.212 62.487,37.012 62.487,35.637
XIN_24M: C276.1 R325.1 R327.2 Y3.3
XOUT: R323.2 R328.2 U29.J1 | length 3.5
  L6 BOT w0.125: U29.J1@70.162,45.762 73.612,45.762
XOUT32: C272.1 R324.2 U29.AA13 Y1.1 | length 2.2
  L6 BOT w0.125: 62.187,35.837 62.187,37.137 62.362,37.312 U29.AA13@62.362,37.962
XOUT_24M: C280.1 R327.1 R328.1 Y3.1
pads on no net: C222.1 C222.2 C224.1 C224.2 J3.1 J3.7 J13.6 J14.6 J16.4 J17.14 J17.15 J25.1 J27.6 J28.6 R41.2 R280.1 R280.2 R284.1 R284.2 TP15.0 U2.2 U2.3 U2.5 U3.136 U3.137 U4.7 U4.8 U4.9 U4.10 U4.16 U5.2 U5.3 U10.10 U10.12 U10.13 U16.23 U16.24 U16.25 U16.26 U21.4 U22.1 U23.A1 U23.A2 U23.A9 U23.A10 U23.B1 U23.B10 U23.D2 U23.D3 U23.D4 U23.D5 U23.D6 U23.D7 U23.D8 U23.D9 U23.E2 U23.E3 U23.E4@40.164,38.48 U23.E5 U23.E6 U23.E7 U23.E8 U23.E9 U23.F2@42.164,37.48 U23.F3@41.164,37.48 U23.F4@40.164,37.48 U23.F5@39.164,37.48 U23.F6@38.164,37.48 U23.F7@37.164,37.48 U23.F8@36.164,37.48 U23.F9@35.164,37.48 U23.G2@42.164,36.48 U23.G3@41.164,36.48 U23.G4@40.164,36.48 U23.G5@39.164,36.48 U23.G6@38.164,36.48 U23.G7@37.164,36.48 U23.G8@36.164,36.48 U23.G9@35.164,36.48 U23.H2@42.164,35.48 U23.H3@41.164,35.48 U23.H4 U23.H5 U23.H6 U23.H7 U23.H8@36.164,35.48 U23.H9@35.164,35.48 U23.J2 U23.J3 U23.J4 U23.J5@39.164,34.48 U23.J6 U23.J7 U23.J8 U23.J9 U23.K2@42.164,33.48 U23.K3@41.164,33.48 U23.K4 U23.K5@39.164,33.48 U23.K6 U23.K7 U23.K8@36.164,33.48 U23.K9@35.164,33.48 U23.L2@42.164,32.48 U23.L3@41.164,32.48 U23.L4@40.164,32.48 U23.L5 U23.L6 U23.L7@37.164,32.48 U23.L8@36.164,32.48 U23.L9@35.164,32.48 U23.M2 U23.M3 U23.M4@40.164,31.48 U23.M5@39.164,31.48 U23.M6 U23.M7@37.164,31.48 U23.M8 U23.M9 U23.N2@42.164,30.48 U23.N3@41.164,30.48 U23.N4 U23.N5 U23.N6 U23.N7 U23.N8@36.164,30.48 U23.N9@35.164,30.48 U23.P2@42.164,29.48 U23.P3@41.164,29.48 U23.P4 U23.P5@39.164,29.48 U23.P6@38.164,29.48 U23.P7 U23.P8@36.164,29.48 U23.P9@35.164,29.48 U23.T1 U23.T10 U23.U1 U23.U2 U23.U9 U23.U10 U29.A15 U29.A16 U29.A20 U29.AA18 U29.AA19 U29.B13 U29.B15 U29.B18 U29.C2 U29.C3 U29.C4 U29.C7 U29.C18 U29.C20 U29.D2 U29.D3 U29.D4 U29.D7 U29.D16 U29.D17 U29.D21 U29.E4 U29.E8 U29.E14 U29.E18 U29.F3 U29.F4 U29.F14 U29.F18 U29.F19 U29.F21 U29.G3 U29.G4 U29.G8 U29.G9 U29.G12 U29.G14 U29.G16 U29.G19 U29.H12 U29.H15 U29.J11 U29.J14 U29.J20 U29.J21 U29.K7 U29.K8 U29.M12 U29.M13 U29.M14 U29.P9 U29.P10 U29.R13 U29.U14 U29.V15 U29.V19 U29.V20 U29.V21 U29.W11 U29.Y15 U29.Y19 U31.8 U31.10 U35.2 U35.3 U45.1 U49.2 U49.3 U49.9 U49.10 U49.11 U50.7 U50.9 U51.17 U53.J1 U53.J9 U53.L1 U53.L9
copper on no net: | length 348
  L1 TOP w0.1: 53.524,46.087 59.462,46.087 v1(60.087,46.712) ; 54.237,47.3 58.05,47.3 v1(58.137,47.387) ; 54.512,44.812 54.787,45.087 61.362,45.087 61.662,44.787 v1(62.037,44.787) ; 55.062,47.812 55.137,47.737 57.31,47.737 57.385,47.812 57.787,47.812 57.962,47.987 58.612,47.987 58.887,47.712 59.762,47.712 v1(60.087,47.387) ; v1(62.037,46.737) 62.037,50.187 ; v1(62.687,43.487) 63.012,43.812 63.012,45.587 63.187,45.762 63.487,45.762 63.737,46.012 63.737,46.937 63.987,47.187 63.987,51.562 63.912,51.637 ; v1(63.337,45.437) 63.662,45.112 64.137,45.112 64.312,45.287 64.312,46.737 64.387,46.812 64.387,47.745 64.587,47.945 ; v1(65.287,47.387) 65.637,47.737 65.762,47.737 65.787,47.712 66.137,47.712 66.262,47.837 66.262,50.287 ; 65.487,51.937 65.287,51.737 65.287,49.887 65.562,49.612 65.562,49.062 v1(65.937,48.687)
  L1 TOP w0.125: 53.472,43.412 54.562,43.412 55.237,44.087 61.987,44.087 v1(62.037,44.137) ; 53.518,44.288 53.988,44.288 54.512,44.812 ; 53.518,47.637 53.9,47.637 54.237,47.3 ; 53.518,48.662 54.212,48.662 55.062,47.812 ; 53.518,49.187 54.393,49.187 55.593,47.987 57.087,47.987 57.237,48.137 v1(57.637,48.137) ; 57.637,52.487 59.212,50.912 59.212,49.562 v1(59.437,49.337) ; 58.171,52.653 58.844,51.98 59.669,51.98 60.387,51.262 60.387,49.637 v1(60.087,49.337) ; 59.598,34.96 59.598,36.298 60.737,37.437 v1(60.737,38.937) ; 59.969,34.96 59.969,36.144 61.187,37.362 61.187,38.862 61.787,39.462 61.787,40.487 v1(61.387,40.887) ; 60.325,52.799 61.362,51.762 61.362,49.887 61.762,49.487 61.762,48.412 v1(61.387,48.037) ; 60.837,52.787 62.112,51.512 62.112,50.462 62.037,50.387 62.037,50.187 ; 61.413,52.737 62.362,51.787 v1(62.362,49.862) ; 63.737,52.832 63.737,51.812 63.912,51.637 ; 64.587,47.945 64.587,52.711 ; 65.487,51.937 65.487,52.711 ; 66.262,50.287 66.637,50.662 66.637,51.687 66.337,51.987 66.337,52.711 ; v1(68.537,47.387) 68.887,47.737 71.162,47.737 71.712,48.287 ; v1(68.537,48.037) 68.562,48.012 70.687,48.012 71.437,48.762 71.756,48.762 ; v1(68.537,48.687) 69.112,49.262 71.778,49.262 ; v1(68.537,49.337) 68.812,49.612 71.287,49.612 71.537,49.862 71.746,49.862 ; v1(68.537,49.987) 70.887,49.987 71.624,50.724 v2(71.624,51.374) ; v1(69.187,47.387) 71.512,47.387 71.987,47.862
  L1 TOP w0.3: 70.775,38.962 v1(71.237,38.562)
  L1 TOP w0.35: 71.237,37.912 v1(71.237,38.562)
  L2 GND 1 w0.102: 90,0.762 90,79.248
  L6 BOT w0.1: 53.762,40.237 58.137,40.237 58.462,39.912 ; 54.912,44.137 55.212,44.437 56.262,44.437 56.562,44.137 58.831,44.137 58.906,44.212 60.212,44.212 60.287,44.137 61.387,44.137 61.712,43.812 ; 54.995,46.762 58.162,46.762 58.462,47.062 ; 56.662,46.087 56.887,46.087 ; v1(57.637,48.137) 57.837,48.137 57.937,48.037 58.787,48.037 59.112,47.712 ; v1(58.137,47.387) 58.462,47.712 ; 59.112,49.662 59.412,49.962 59.412,52.012 ; v1(59.437,49.337) 59.762,49.012 ; v1(60.087,46.712) 60.762,46.712 61.062,46.412 ; v1(60.087,47.387) 60.412,47.062 ; v1(60.087,49.337) 60.412,49.012 ; 61.062,38.612 61.387,38.287 61.387,37.187 ; v1(61.387,40.887) 61.712,40.562 ; v1(61.387,48.037) 61.712,47.712 ; 61.712,45.762 62.037,45.437 v1(62.037,44.787) ; 61.712,47.062 v1(62.037,46.737) ; 61.712,48.362 62.012,48.662 62.512,48.662 62.687,48.837 62.687,49.537 v1(62.362,49.862) ; v1(62.037,44.137) 62.362,43.812 ; 62.362,41.862 62.362,41.637 62.712,41.287 62.712,38.712 62.912,38.512 62.912,36.962 ; 62.362,50.312 62.687,50.637 62.687,52.462 ; 63.012,46.412 62.687,46.737 62.687,47.862 63.087,48.262 63.087,51.987 63.287,52.187 ; 63.012,47.062 63.012,47.812 63.312,48.112 63.312,51.712 63.537,51.937 63.537,51.962 ; v1(63.337,45.437) 63.662,45.762 ; 63.812,37.162 63.987,37.337 63.987,38.187 63.537,38.637 63.537,38.937 63.337,39.137 63.337,41.037 63.987,41.687 63.987,41.987 64.312,42.312 64.312,42.512 ; 64.512,36.727 64.587,36.802 64.587,38.512 64.212,38.887 64.212,39.712 63.887,40.037 63.887,40.962 64.612,41.687 64.612,41.937 64.962,42.287 64.962,42.512 ; v1(65.287,47.387) 65.612,47.062 ; 65.612,45.112 65.937,44.787 66.821,44.787 66.946,44.662 68.512,44.662 68.637,44.787 70.833,44.787 70.925,44.696 73.623,44.696 ; 65.612,48.362 v1(65.937,48.687) ; 65.962,52.711 65.962,49.962 66.255,49.669 66.262,49.669 ; 68.212,47.069 68.53,47.387 v1(68.537,47.387) ; 68.212,47.712 v1(68.537,48.037) ; 68.212,48.362 v1(68.537,48.687) ; 68.212,49.012 v1(68.537,49.337) ; 68.212,49.662 v1(68.537,49.987) ; 68.862,47.069 69.169,46.762 70.962,46.762 ; 68.862,47.719 69.187,47.394 v1(69.187,47.387) ; 68.862,49.665 69.184,49.987 69.184,51.684 ; 69.162,48.712 72.112,48.712
  L6 BOT w0.125: 52.037,44.137 54.912,44.137 ; 52.037,46.212 55.437,46.212 55.887,45.762 57.162,45.762 ; 52.037,46.487 55.612,46.487 56.012,46.087 56.662,46.087 ; 52.037,47.712 57.162,47.712 ; 54.312,39.912 57.162,39.912 ; 54.487,39.587 57.487,39.587 57.812,39.912 ; 56.887,46.087 57.487,46.087 57.812,45.762 ; 56.912,36.312 56.912,36.337 58.137,37.562 58.137,38.287 58.462,38.612 ; 58.462,36.787 58.462,37.962 ; 58.787,52.737 58.787,52.137 58.787,50.637 59.112,50.312 ; 59.112,36.462 59.112,37.962 ; 59.412,52.012 59.412,52.711 ; v1(60.737,38.937) 60.737,39.587 61.062,39.912 ; 61.387,35.787 61.387,37.187 ; v1(62.687,43.487) 63.012,43.812 ; 63.537,51.962 63.537,56.362 ; 68.862,49.012 69.162,48.712 ; 69.184,51.684 69.537,52.037 70.587,52.037 70.95,52.4 ; 69.512,49.012 69.837,49.337 71.762,49.337 72.182,49.757 73.076,49.757 ; 69.512,49.665 69.834,49.987 71.362,49.987 71.769,50.394 73.076,50.394 ; 70.962,46.762 71.212,46.512 72.587,46.512 72.956,46.881 73.381,46.881 ; v2(71.624,51.374) 72,51.75 ; 72.112,48.712 72.377,48.977 73.076,48.977
  L6 BOT w0.3: 52.637,42.162 53.15,42.162
  other v2: 19.434,12.065 19.688,15.875 9.779,36.068 9.37,60.19 9.624,64 9.624,64

## Polygon pours and split planes (outlines as drawn)
GND on L1 TOP "GND_L01_P022" (solid, pour order 22): 19.67,23.622 18.942,23.622 ccw(c18.942,23.476) 18.796,23.476 18.796,21.844 17.907,21.844 ccw(c17.907,21.695) 17.758,21.695 17.758,20.977 ccw(c17.907,20.977) 17.907,20.828 19.558,20.828 ccw(c19.558,21.082) 19.812,21.082 19.812,23.48 ccw(c19.67,23.48)
EXP_12V on L1 TOP "EXP_12V_L01_P021" (solid, pour order 21): 20.208,23.622 20.936,23.622 cw(c20.936,23.476) 21.082,23.476 21.082,21.844 21.971,21.844 cw(c21.971,21.695) 22.12,21.695 22.12,20.977 cw(c21.971,20.977) 21.971,20.828 20.32,20.828 cw(c20.32,21.082) 20.066,21.082 20.066,23.48 cw(c20.208,23.48)
12V_HEATER on L1 TOP "12V_HEATER_L01_P020" (solid, pour order 20): 16.787,19.832 20.216,19.832 cw(c20.216,19.44) 20.608,19.44 20.608,12.573 20.269,12.573 20.269,15.802 ccw(c19.18,15.802) 19.18,16.891 16.774,16.891 cw(c16.774,17.279) 16.386,17.279 16.386,19.431 cw(c16.787,19.431)
no net on L1 TOP "NONET_L01_P019" (solid, pour order 19): 8.763,35.052 8.763,34.909 9.615,34.057 9.615,31.346 9.062,31.346 ccw(c9.062,31.041) 8.846,31.257 8.509,30.919 8.509,30.81 ccw(c8.585,30.81) 8.585,30.734 9.779,30.734 ccw(c9.779,30.904) 9.949,30.904 9.949,34.882 ccw(c9.525,34.882) 9.525,35.306 9.017,35.306 ccw(c9.017,35.052)
no net on L1 TOP "NONET_L01_P018" (solid, pour order 18): 8.763,44.323 8.763,44.18 9.615,43.328 9.615,40.617 9.062,40.617 ccw(c9.062,40.312) 8.846,40.528 8.509,40.19 8.509,40.081 ccw(c8.585,40.081) 8.585,40.005 9.779,40.005 ccw(c9.779,40.175) 9.949,40.175 9.949,44.153 ccw(c9.525,44.153) 9.525,44.577 9.017,44.577 ccw(c9.017,44.323)
no net on L1 TOP "NONET_L01_P017" (solid, pour order 17): 8.847,54.324 8.847,54.181 9.699,53.328 9.699,50.618 9.146,50.618 ccw(c9.146,50.313) 8.93,50.528 8.593,50.191 8.593,50.082 ccw(c8.669,50.082) 8.669,50.006 9.863,50.006 ccw(c9.863,50.175) 10.032,50.175 10.032,54.154 ccw(c9.609,54.154) 9.609,54.578 9.101,54.578 ccw(c9.101,54.324)
no net on L1 TOP "NONET_L01_P016" (solid, pour order 16): 6.723,67.957 10.152,67.957 cw(c10.152,67.565) 10.544,67.565 10.544,60.698 10.205,60.698 10.205,63.927 ccw(c9.116,63.927) 9.116,65.016 6.71,65.016 cw(c6.71,65.404) 6.322,65.404 6.322,67.556 cw(c6.723,67.556)
no net on L1 TOP "NONET_L01_P015" (solid, pour order 15): 6.708,58.027 10.137,58.027 cw(c10.137,57.635) 10.529,57.635 10.529,50.768 10.19,50.768 10.19,53.997 ccw(c9.101,53.997) 9.101,55.086 6.695,55.086 cw(c6.695,55.474) 6.307,55.474 6.307,57.626 cw(c6.708,57.626)
no net on L1 TOP "NONET_L01_P014" (solid, pour order 14): 6.624,48.026 10.053,48.026 cw(c10.053,47.634) 10.445,47.634 10.445,40.767 10.106,40.767 10.106,43.996 ccw(c9.017,43.996) 9.017,45.085 6.611,45.085 cw(c6.611,45.473) 6.223,45.473 6.223,47.625 cw(c6.624,47.625)
LP_12V on L1 TOP "LP_12V_L01_P013" (solid, pour order 13): 6.621,29.23 10.05,29.23 cw(c10.05,28.838) 10.442,28.838 10.442,21.971 10.103,21.971 10.103,25.2 ccw(c9.014,25.2) 9.014,26.289 6.608,26.289 cw(c6.608,26.677) 6.22,26.677 6.22,28.829 cw(c6.621,28.829)
EXP_12V on L1 TOP "EXP_12V_L01_P010" (solid, pour order 10): 6.497,19.832 9.926,19.832 cw(c9.926,19.44) 10.318,19.44 10.318,12.573 9.979,12.573 9.979,15.802 ccw(c8.89,15.802) 8.89,16.891 6.484,16.891 cw(c6.484,17.279) 6.096,17.279 6.096,19.431 cw(c6.497,19.431)
EXP_12V on L1 TOP "EXP_12V_L01_P007" (solid, pour order 7): 8.76,25.527 8.76,25.384 9.612,24.532 9.612,21.821 9.059,21.821 ccw(c9.059,21.516) 8.843,21.732 8.506,21.394 8.506,21.285 ccw(c8.582,21.285) 8.582,21.209 9.776,21.209 ccw(c9.776,21.379) 9.946,21.379 9.946,25.357 ccw(c9.522,25.357) 9.522,25.781 9.014,25.781 ccw(c9.014,25.527)
EXP_12V on L1 TOP "EXP_12V_L01_P003" (solid, pour order 3): 18.926,16.129 18.926,15.986 19.778,15.134 19.778,12.423 19.225,12.423 ccw(c19.225,12.118) 19.009,12.334 18.672,11.996 18.672,11.887 ccw(c18.748,11.887) 18.748,11.811 19.942,11.811 ccw(c19.942,11.981) 20.112,11.981 20.112,15.959 ccw(c19.688,15.959) 19.688,16.383 19.18,16.383 ccw(c19.18,16.129)
no net on L1 TOP "NONET_L01_P002" (solid, pour order 2): 8.862,64.254 8.862,64.111 9.714,63.259 9.714,60.548 9.161,60.548 ccw(c9.161,60.243) 8.945,60.459 8.608,60.121 8.608,60.012 ccw(c8.684,60.012) 8.684,59.936 9.878,59.936 ccw(c9.878,60.106) 10.047,60.106 10.047,64.084 ccw(c9.624,64.084) 9.624,64.508 9.116,64.508 ccw(c9.116,64.254)
no net on L1 TOP "NONET_L01_P000" (solid, pour order 0): 6.624,38.755 10.053,38.755 cw(c10.053,38.363) 10.445,38.363 10.445,31.496 10.106,31.496 10.106,34.725 ccw(c9.017,34.725) 9.017,35.814 6.611,35.814 cw(c6.611,36.202) 6.223,36.202 6.223,38.354 cw(c6.624,38.354)
no net on L6 BOT "NONET_L06_P012" (solid, pour order 12): 12.411,50.267 12.411,54.331 ccw(c12.157,54.331) 12.157,54.585 8.347,54.585 ccw(c8.347,54.215) 7.977,54.215 7.977,53.315 7.977,50.297 ccw(c8.262,50.297) 8.262,50.013 12.157,50.013 ccw(c12.157,50.267)
no net on L6 BOT "NONET_L06_P011" (solid, pour order 11): 12.327,40.266 12.327,44.33 ccw(c12.073,44.33) 12.073,44.584 8.263,44.584 ccw(c8.263,44.215) 7.894,44.215 7.894,43.314 7.894,40.297 ccw(c8.179,40.297) 8.179,40.012 12.073,40.012 ccw(c12.073,40.266)
no net on L6 BOT "Bottom Layer-IF_12V" (solid, pour order 9): 7.318,9.017 12.192,9.017 12.192,16.121 ccw(c11.938,16.121) 11.938,16.375 7.612,16.375 ccw(c7.612,16.081) 7.318,16.081 7.318,12.998
no net on L6 BOT "NONET_L06_P008" (solid, pour order 8): 7.366,20.193 11.971,20.193 cw(c11.971,19.972) 12.192,19.972 12.192,16.891 cw(c11.938,16.891) 11.938,16.637 7.366,16.637 cw(c7.366,16.891) 7.112,16.891 7.112,19.939 cw(c7.366,19.939)
EXP_12V on L6 BOT "EXP_12V_L06_P006" (solid, pour order 6): 12.316,21.463 12.316,25.527 ccw(c12.062,25.527) 12.062,25.781 8.252,25.781 ccw(c8.252,25.412) 7.883,25.412 7.883,24.511 7.883,21.494 ccw(c8.168,21.494) 8.168,21.209 12.062,21.209 ccw(c12.062,21.463)
EXP_12V on L6 BOT "EXP_12V_L06_P005" (solid, pour order 5): 22.482,12.065 22.482,16.129 ccw(c22.228,16.129) 22.228,16.383 18.418,16.383 ccw(c18.418,16.014) 18.049,16.014 18.049,15.113 18.049,12.096 ccw(c18.334,12.096) 18.334,11.811 22.228,11.811 ccw(c22.228,12.065)
no net on L6 BOT "NONET_L06_P004" (solid, pour order 4): 12.418,60.19 12.418,64.254 ccw(c12.164,64.254) 12.164,64.508 8.354,64.508 ccw(c8.354,64.139) 7.985,64.139 7.985,63.238 7.985,60.221 ccw(c8.269,60.221) 8.269,59.936 12.164,59.936 ccw(c12.164,60.19)
no net on L6 BOT "NONET_L06_P001" (solid, pour order 1): 7.493,39.116 12.098,39.116 cw(c12.098,38.895) 12.319,38.895 12.319,35.814 cw(c12.065,35.814) 12.065,35.56 7.493,35.56 cw(c7.493,35.814) 7.239,35.814 7.239,38.862 cw(c7.493,38.862)

## Keep-outs
Keep-Out Layer:
  the board outline again, w0.5

## Other copper
L1 TOP:
  region net IF_12V: 9.502,12.804 9.502,9.675 ccw(c9.833,9.675) 9.833,9.344 14.101,9.344 14.101,11.426 ccw(c13.716,11.426) 13.716,11.811 9.806,11.811 9.806,12.804

## Silkscreen, mask and mechanical layers (free items; w line width, h text height)
Top Overlay:
  drawing of 17 lines, arcs and shapes, not listed
  text "Designed by: Sang Huynh" at 71.116,-7.747 h1.5
  text "Checked by: Bao Bui" at 72.518,-8.847 h1.5
  text "Approved by: Vu Pham" at 72.348,-10.238 h1.5
  text "BEE-1006  PAY-EXP V1.1.0" at 40.449,-13.915 h2.3

## Text inside footprints (layer, text, board x,y; h text height)
C151: Top Courtyard "C" at 60.682,48.592 h0.2
C152: Top Courtyard "C" at 60.147,48.147 h0.2 r180
C232: Top Courtyard "C" at 58.796,48.968 h0.2 r180
C233: Top Courtyard "C" at 57.238,50.308 h0.2 r180
C234: Top Courtyard "C" at 57.519,48.736 h0.2 r180
C235: Top Courtyard "C" at 59.866,50.623 h0.2 r90
C236: Top Courtyard "C" at 61.812,50.612 h0.2 r90
C237: Top Courtyard "C" at 62.457,48.614 h0.2 r90
C238: Top Courtyard "C" at 62.257,40.309 h0.2 r270
C239: Top Courtyard "C" at 59.442,43.264 h0.2 r180
C240: Top Courtyard "C" at 59.442,45.852 h0.2 r180
C241: Top Courtyard "C" at 63.762,50.623 h0.2 r90
C242: Top Courtyard "C" at 57.53,46.506 h0.2 r180
C243: Top Courtyard "C" at 61.612,38.299 h0.2 r270
C245: Top Courtyard "C" at 69.82,44.362 h0.2
C246: Top Courtyard "C" at 66.687,47.962 h0.2 r90
C247: Top Courtyard "C" at 60.643,41.612 h0.2 r270
C248: Top Courtyard "C" at 60.662,40.137 h0.2
C249: Top Courtyard "C" at 65.064,48.714 h0.2 r90
C250: Top Courtyard "C" at 65.001,46.277 h0.2 r90
C251: Top Courtyard "C" at 57.504,42.594 h0.2 r180
C252: Top Courtyard "C" at 60.887,47.131 h0.2 r270
C253: Top Courtyard "C" at 59.666,38.327 h0.2 r270
C254: Top Courtyard "C" at 57.225,38.75 h0.2 r180
C255: Top Courtyard "C" at 57.477,40.388 h0.2 r180
C256: Top Courtyard "C" at 59.11,40.487 h0.2 r90
C257: Top Courtyard "C" at 57.504,44.575 h0.2 r180
C258: Top Courtyard "C" at 61.492,42.924 h0.2 r180
C259: Top Courtyard "C" at 61.787,45.827 h0.2 r180
C262: Top Courtyard "C" at 65.863,46.865 h0.2
C263: Top Courtyard "C" at 67.662,50.612 h0.2 r90
C264: Top Courtyard "C" at 69.851,48.262 h0.2
C265: Top Courtyard "C" at 31.396,187.273 h0.2 r270
C266: Top Courtyard "C" at 65.708,50.623 h0.2 r90
C267: Top Courtyard "C" at 15.213,188.774 h0.2 r90
C268: Top Courtyard "C" at 70.312,50.873 h0.2 r90
C269: Top Courtyard "C" at 66.988,46.434 h0.2 r180
C270: Top Courtyard "C" at 60.187,41.462 h0.2 r90
C271: Top Courtyard "C" at 67.858,45.662 h0.2
C272: Top Courtyard "C" at 29.745,187.273 h0.2 r270
C273: Top Courtyard "C" at 13.043,88.868 h0.2 r90
C275: Top Courtyard "C" at 10.127,88.868 h0.2 r90
C276: Top Courtyard "C" at 23.649,179.145 h0.2 r270
C277: Top Courtyard "C" at 67.134,48.106 h0.2 r270
C278: Top Courtyard "C" at 67.787,48.106 h0.2 r270
C279: Top Courtyard "C" at 20.166,198.553 h0.2 r90
C280: Top Courtyard "C" at 20.626,176.43 h0.2
C281: Top Courtyard "C" at 110.039,202.096 h0.2 r90
C282: Top Courtyard "C" at 108.581,202.096 h0.2 r90
C285: Top Courtyard "C" at 130.853,199.838 h0.2
C286: Top Courtyard "C" at 114.413,202.096 h0.2 r90
C287: Top Courtyard "C" at 115.871,202.096 h0.2 r90
C288: Top Courtyard "C" at 111.497,202.096 h0.2 r90
C289: Top Courtyard "C" at 112.955,202.096 h0.2 r90
C290: Top Courtyard "C" at 128.993,202.096 h0.2 r90
C291: Top Courtyard "C" at 139.199,202.096 h0.2 r90
C292: Top Courtyard "C" at 137.741,202.096 h0.2 r90
C293: Top Courtyard "C" at 136.283,202.096 h0.2 r90
C294: Top Courtyard "C" at 140.657,202.096 h0.2 r90
C295: Top Courtyard "C" at 131.909,202.096 h0.2 r90
C296: Top Courtyard "C" at 130.451,202.096 h0.2 r90
C297: Top Courtyard "C" at 134.825,202.096 h0.2 r90
C298: Top Courtyard "C" at 133.367,202.096 h0.2 r90
C299: Top Courtyard "C" at 181.692,39.409 h0.2 r90
C300: Top Courtyard "C" at 189.042,39.409 h0.2 r90
C302: Top Courtyard "C" at 76.668,21.35 h0.2 r180
C303: Top Courtyard "C" at 80.977,23.17 h0.2
C304: Top Courtyard "C" at 80.58,25.373 h0.2 r180
C305: Top Courtyard "C" at 80.418,27.993 h0.2 r90
C306: Top Courtyard "C" at 76.337,27.362 h0.2 r180
C307: Top Courtyard "C" at 82.776,32.545 h0.2 r270
C308: Top Courtyard "C" at 74.345,32.545 h0.2 r270
C309: Top Courtyard "C" at 82.776,30.933 h0.2 r270